# Altium PCB EE3102_Individual.PcbDoc
Units mil, origin at the board's own origin, x right, y up, seen from the top; angles counter-clockwise.
Board outline 2047.24 x 1062.99 mil, 2 copper layers (Top Layer, Bottom Layer); 21 components, 8 nets, 59 pads, 45 vias.
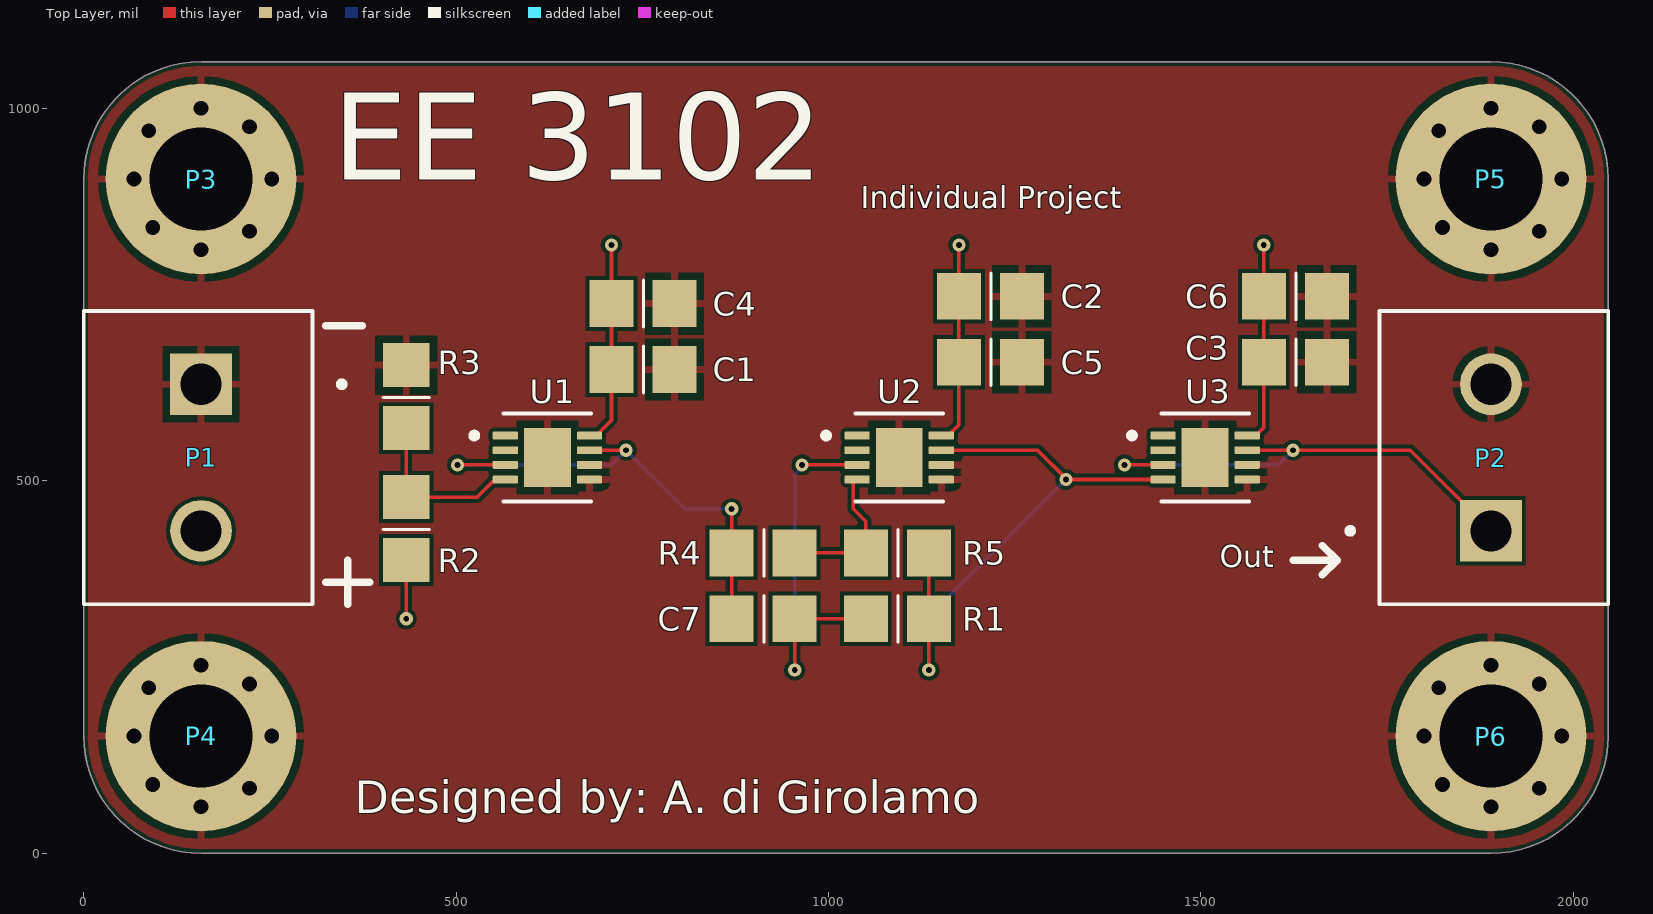
[diagram p0: Top Layer view]
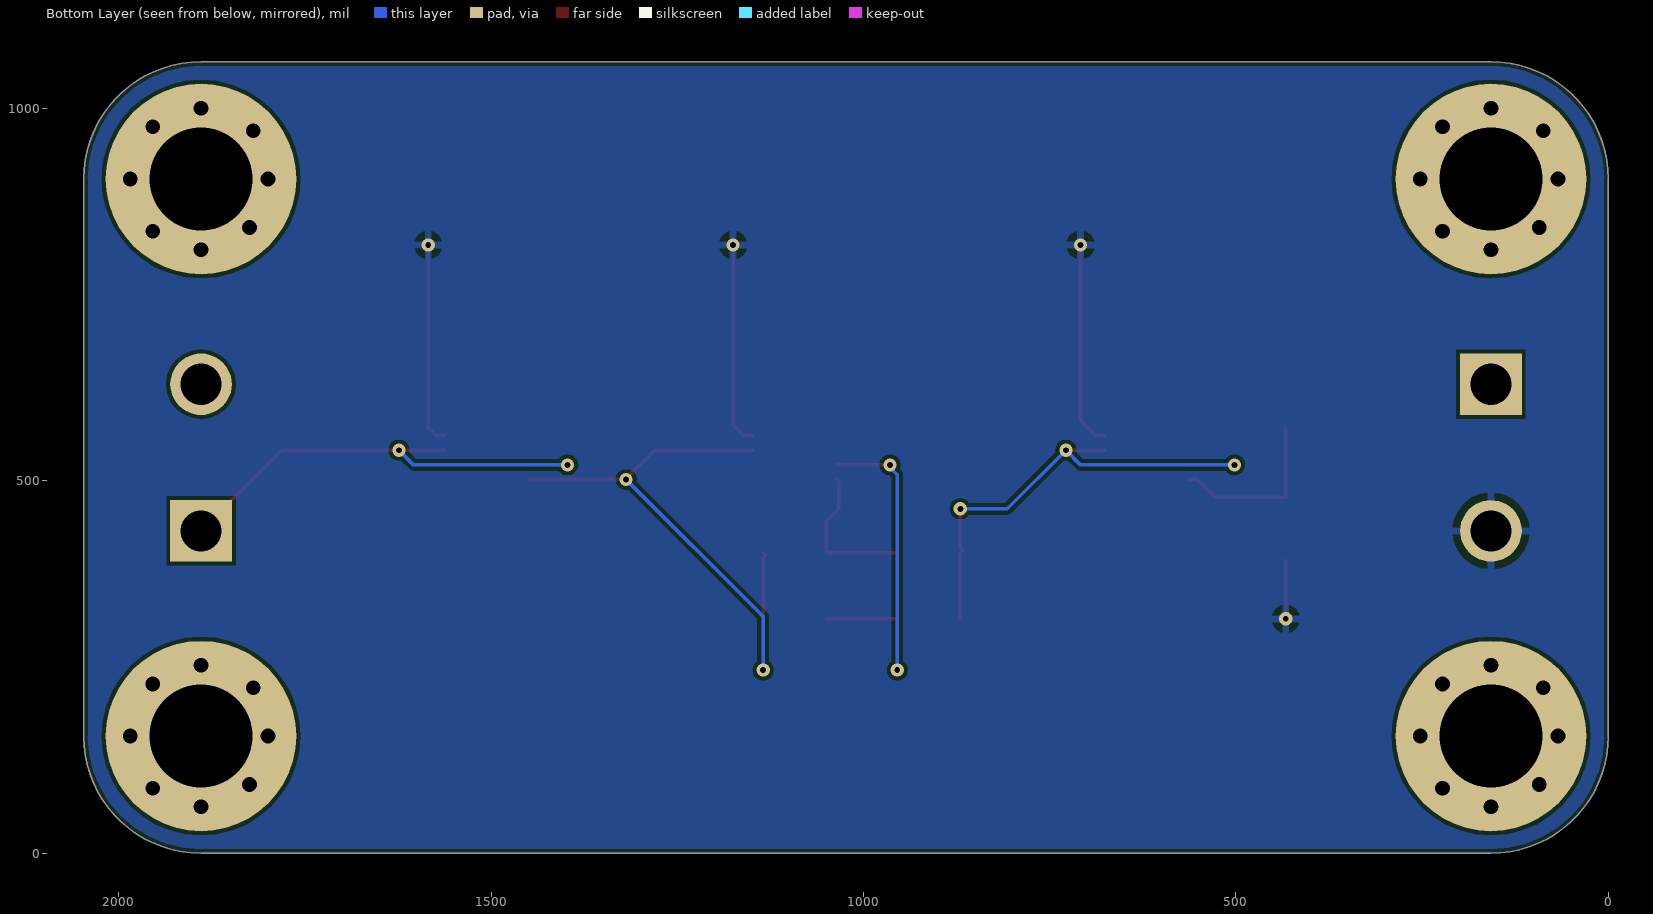
[diagram p1: Bottom Layer view, seen from below]
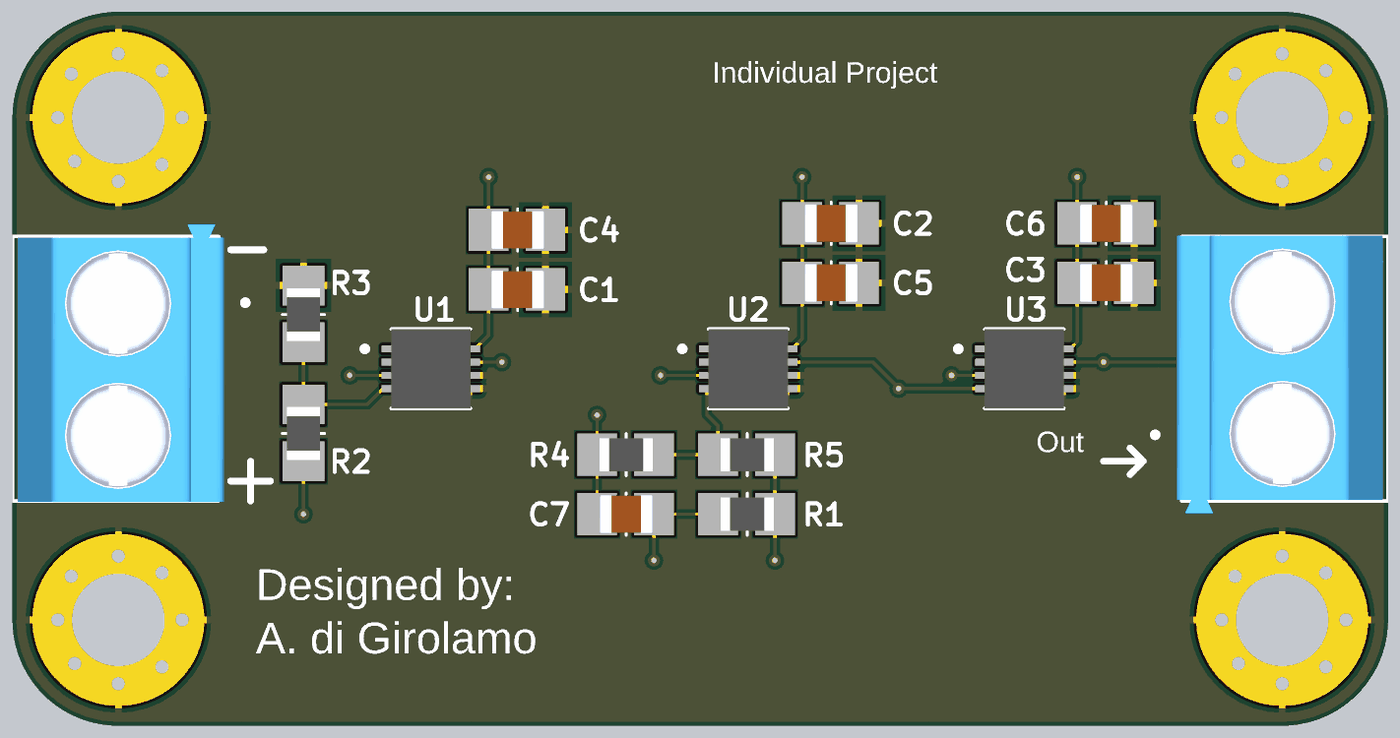
[diagram p2: 3D render of the assembled board from above, using the file's embedded part models]

## Layer stack, top to bottom
Top Solder: solder mask 0.4, Solder Resist, Dk 3.5
Top Layer: signal copper 1.4
Dielectric 1: dielectric 12.6, FR-4, Dk 4.8
Bottom Layer: signal copper 1.4
Bottom Solder: solder mask 0.4, Solder Resist, Dk 3.5

## Board outline
157.48,0 cw(c157.48,157.48) 0,157.48 0,905.51 cw(c157.48,905.51) 157.48,1062.99 1889.76,1062.99 cw(c1889.76,905.51) 2047.24,905.51 2047.24,157.48 cw(c1889.76,157.48) 1889.76,0

## Design rules (kind name [scope] priority, off if disabled: settings)
Clearance [All] p1: gap=5 ignorepadtopadclearanceinfootprint=TRUE
PolygonConnect [All] p1: connectstyle=Relief reliefconductorwidth=10 reliefentries=4 polygonreliefangle="90 Angle" airgapwidth=10
RoutingVias [All] p1: holewidth=28 width=50 viastyle="Through Hole" minholewidth=28 minwidth=50 maxholewidth=28 maxwidth=50
SolderMaskExpansion [All] p1: expansion=4 istentingtop=FALSE
Width [All] p1: maxlimit=10 minlimit=5 preferedwidth=5
30 further rules are at their usual default settings.

## Components (designator, comment, footprint, x,y, rotation, side; value= is the part's Value field where it differs from the comment)
C1 "Cap" STD_0805_C 708.66,649.61 r0 top value=4.7uF
C2 "Cap" STD_0805_C 1175.2,748.03 r0 top value=4.7uF
C3 "Cap" STD_0805_C 1584.65,659.45 r0 top value=4.7uF
C4 "Cap" STD_0805_C 708.66,738.19 r0 top value=0.1uF
C5 "Cap" STD_0805_C 1175.2,659.45 r0 top value=0.1uF
C6 "Cap" STD_0805_C 1584.65,748.03 r0 top value=0.1uF
C7 "Cap" STD_0805_C 870.08,314.96 r0 top value=100nF
P1 "Header 2" "CUI_TB003-500-P02BE - duplicate" 157.48,629.92 r270 top value=12
P2 "Header 2" "CUI_TB003-500-P02BE - duplicate" 1889.76,433.07 r90 top
P3 "M3 Mounting Hole" MH-M3 157.48,905.51 r0 top
P4 "M3 Mounting Hole" MH-M3 157.48,157.48 r0 top
P5 "M3 Mounting Hole" MH-M3 1889.76,905.51 r0 top
P6 "M3 Mounting Hole" MH-M3 1889.76,157.48 r0 top
R1 "Res1" STD_0805_R 1050.2,314.96 r0 top value=10k
R2 "Res1" STD_0805_R 433.07,478.35 r270 top value=2K
R3 "Res1" STD_0805_R 433.07,655.51 r270 top value=2K
R4 "Res1" STD_0805_R 870.08,403.54 r0 top value=20K
R5 "Res1" STD_0805_R 1050.2,403.54 r0 top value=20K
U1 "LMH6629" LMH6629 622.64,531.5 r0 top
U2 "LMH6629" LMH6629 1095.08,531.5 r0 top
U3 "LMH6629" LMH6629 1505.91,531.5 r0 top

## Footprints (in the part's own frame and the unit in brackets; to place one, negate y for a bottom-side part, rotate by r counter-clockwise, add the part's x,y. Pads: shape width x height; smd on the part's side, far side on the other; paste and mask are expansions set on the pad)
"CUI_TB003-500-P02BE - duplicate" [mm]
  rect 2.1x2.1 hole 1.4: 1(0,0)
  round 2.1 hole 1.4: 2(5,0)
  silkscreen extent -2.5,-4 7.5,4.9, body extent -2.96,-3.81 7.54,3.99, height 10.3
LMH6629 [mm]
  rrect25% 0.86x0.27 smd: 1(-1.435,0.75) 2(-1.435,0.25) 3(-1.435,-0.25) 4(-1.435,-0.75) 5(1.435,-0.75) 6(1.435,-0.25) 7(1.435,0.25) 8(1.435,0.75)
  rect 1.6x2 smd paste-2: 5(0,0)
  silkscreen extent -2.59,-1.5 1.5,1.5, body extent -1.5,-1.5 1.5,1.5, height 0.8
MH-M3 [mm]
  round 6.5 hole 3.5: 1(0,0)
STD_0805_C [mm]
  rect 1.5x1.6 smd: 1(0,0) 2(2.15,0)
  silkscreen extent 1.1,-0.8 1.1,0.8, body extent 0.1,-0.72 2.1,0.73, height 1.22
STD_0805_R [mm]
  rect 1.5x1.6 smd: 1(0,0) 2(2.15,0)
  silkscreen extent 1.1,-0.8 1.1,0.8, body extent 0.1,-0.62 2.1,0.63, height 0.65

## Part data
C1 C2 C3 C4 C5 C6 C7: "Capacitor", LatestRevisionDate=17-Jul-2002, LatestRevisionNote="Re-released for DXP Platform.", PackageDescription="Radial Cap, Thru-Hole; 2 Leads; 0.3 in Pin Spacing", PackageReference=RAD-0.3, Published=8-Jun-2000, Publisher="Altium Limited"
P1 P2: "Header, 2-Pin", LatestRevisionDate=17-Jul-2002, LatestRevisionNote="Re-released for DXP Platform.", Publisher="Altium Limited"
P3 P4 P5 P6: library part MH-M3
R1 R2 R3 R4 R5: "Resistor", LatestRevisionDate=17-Jul-2002, LatestRevisionNote="Re-released for DXP Platform.", PackageDescription="Axial Device, Thru-Hole; 2 Leads; 0.3 in Pin Spacing", PackageReference=AXIAL-0.3, Published=8-Jun-2000, Publisher="Altium Limited"

## Via types
v1: diameter 19.68, hole 19.68, Top Layer to Bottom Layer, tented both sides, 32 vias
v2: diameter 17.72, hole 7.87, Top Layer to Bottom Layer, tented both sides, 13 vias

## Nets (pads, with @x,y where several pads share a name; then routed paths per layer and width w, separated by ;. In a path a pad name is that pad's centre, name@x,y a point inside that pad or via, vN(x,y) a via of type N, cw(c..) or ccw(c..) an arc to the next point about the centre after c; other vN are vias at no path point)
GND: C1.2 C2.2 C3.2 C4.2 C5.2 C6.2 P1.1 P2.2 P3.1 P4.1 P5.1 P6.1 R3.1 U1.5 U1.6 U2.5 U2.6 U3.5 U3.6
  other v1: 157.48,62.48 1889.76,62.48 222.48,87.48 1954.76,87.48 92.48,92.48 1824.76,92.48 67.48,157.48 252.48,157.48 1799.76,157.48 1984.76,157.48 87.48,222.48 1819.76,222.48 222.48,227.48 1954.76,227.48 157.48,252.48 1889.76,252.48 157.48,810.51 1889.76,810.51 222.48,835.51 1954.76,835.51 92.48,840.51 1824.76,840.51 67.48,905.51 252.48,905.51 1799.76,905.51 1984.76,905.51 87.48,970.51 1819.76,970.51 222.48,975.51 1954.76,975.51 157.48,1000.51 1889.76,1000.51
NetC7_1: C7.1 R4.1 U1.3 U1.7 | length 673.2
  Top Layer w5: v2(501.97,521.65) U1.3@563.58,521.65 ; U1.7@676.57,541.34 v2(728.35,541.34) ; C7.1 R4.1 866.14,407.48 870.08,411.42 v2(870.08,462.6)
  Bottom Layer w5: v2(501.97,521.65) 708.66,521.65 v2(728.35,541.34) 807.09,462.6 v2(870.08,462.6)
NetC7_2: C7.2 R1.1 U2.3 | length 515.5
  Top Layer w5: v2(954.72,246.06) C7.2 R1.1 ; v2(964.57,521.65) U2.3@1036.02,521.65
  Bottom Layer w5: v2(954.72,246.06) 954.72,508.37 964.57,518.21 v2(964.57,521.65)
NetR1_2: R1.2 R5.2 U2.7 U3.4 | length 808.8
  Top Layer w5: v2(1134.84,246.06) R1.2 1134.84,397.64 1131.89,400.59 R5.2 ; U2.7@1149.02,541.34 1280.94,541.34 1320.31,501.97 U3.4
  Bottom Layer w5: v2(1134.84,246.06) 1134.84,317.91 v2(1318.9,501.97)
NetR2_1: R2.1 R3.2 U1.4 | length 232.8
  Top Layer w5: R3.2 R2.1 528.35,478.35 551.97,501.97 U1.4@563.58,501.97
NetR4_2: R4.2 R5.1 U2.4 | length 201.9
  Top Layer w5: R4.2 R5.1 1050.2,445.87 1033.46,462.6 1033.46,499.41 U2.4@1036.02,501.97
VCC: C1.1 C2.1 C3.1 C4.1 C5.1 C6.1 P1.2 R2.2 U1.8 U2.8 U3.8 | length 900.2
  Top Layer w5: v2(433.07,314.96) R2.2 ; U1.8@676.57,561.02 688.19,561.02 708.66,581.5 C1.1 C4.1 v2(708.66,816.93) ; U2.8@1149.02,561.02 1160.63,561.02 1175.2,575.59 C5.1 C2.1 v2(1175.2,816.93) ; U3.8 1574.02,561.02 1584.65,571.65 C3.1 C6.1 v2(1584.65,816.93)
Vout: P2.1 U3.3 U3.7 | length 658.5
  Top Layer w5: v2(1397.64,521.65) U3.3 ; U3.7 v2(1624.02,541.34) 1781.5,541.34 P2.1
  Bottom Layer w5: v2(1397.64,521.65) 1604.33,521.65 v2(1624.02,541.34)
pads on no net: U1.1 U1.2 U2.1 U2.2 U3.1 U3.2

## Polygon pours and split planes (outlines as drawn)
VCC on Bottom Layer "POWER_PLANE" (solid, pour order 1): 157.48,0 cw(c157.48,157.48) 0,157.48 0,905.51 cw(c157.48,905.51) 157.48,1062.99 1889.76,1062.99 cw(c1889.76,905.51) 2047.24,905.51 2047.24,157.48 cw(c1889.76,157.48) 1889.76,0
GND on Top Layer "GND_PLANE" (solid, pour order 0): 157.48,0 cw(c157.48,157.48) 0,157.48 0,905.51 cw(c157.48,905.51) 157.48,1062.99 1889.76,1062.99 cw(c1889.76,905.51) 2047.24,905.51 2047.24,157.48 cw(c1889.76,157.48) 1889.76,0

## Keep-outs
Keep-Out Layer:
  the board outline again, w1

## Silkscreen, mask and mechanical layers (free items; w line width, h text height)
Top Overlay:
  lines w10: 324.8,364.17 383.86,364.17 ; 324.8,708.66 374.02,708.66 ; 354.33,334.65 354.33,393.7 ; 1624.02,393.7 1683.07,393.7 ; 1663.39,374.02 1683.07,393.7 ; 1663.39,413.39 1683.07,393.7
  text "EE 3102" at 334.65,866.14 h200
  text "Individual Project" at 1043.31,856.3 h50
  text "Out" at 1525.59,374.02 h50
  text "Designed by: A. di Girolamo" at 364.17,39.37 h75
Mechanical 2:
  the board outline again, w10